# Altium PCB placaMotoresPCB.PcbDoc
Units mm, origin at the board's own origin, x right, y up, seen from the top; angles counter-clockwise.
Board outline 45.21 x 57.66 mm, 2 copper layers (Top Layer, Bottom Layer); 10 components, 39 nets, 74 pads, 0 vias.
Unrouted connection lines stored in the file: 3.
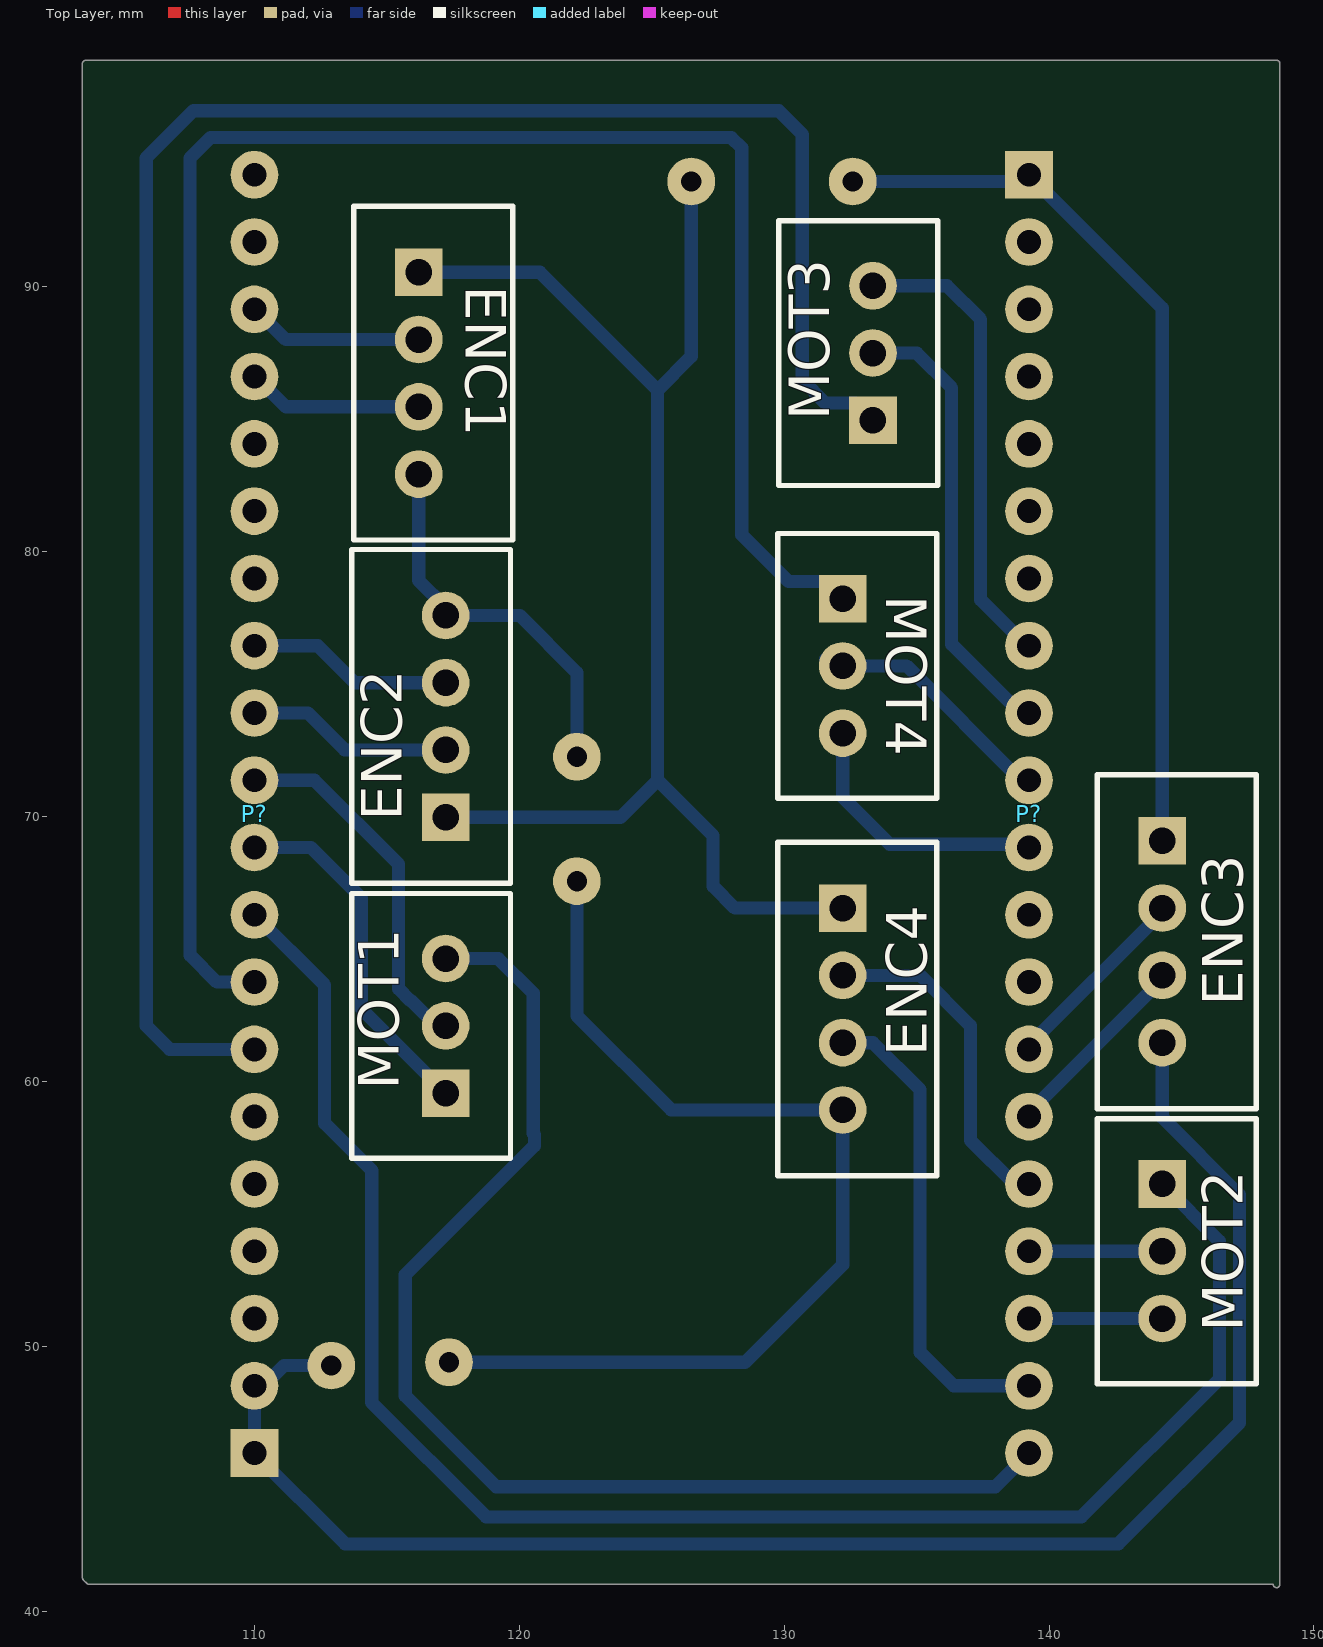
[diagram p0: Top Layer view]
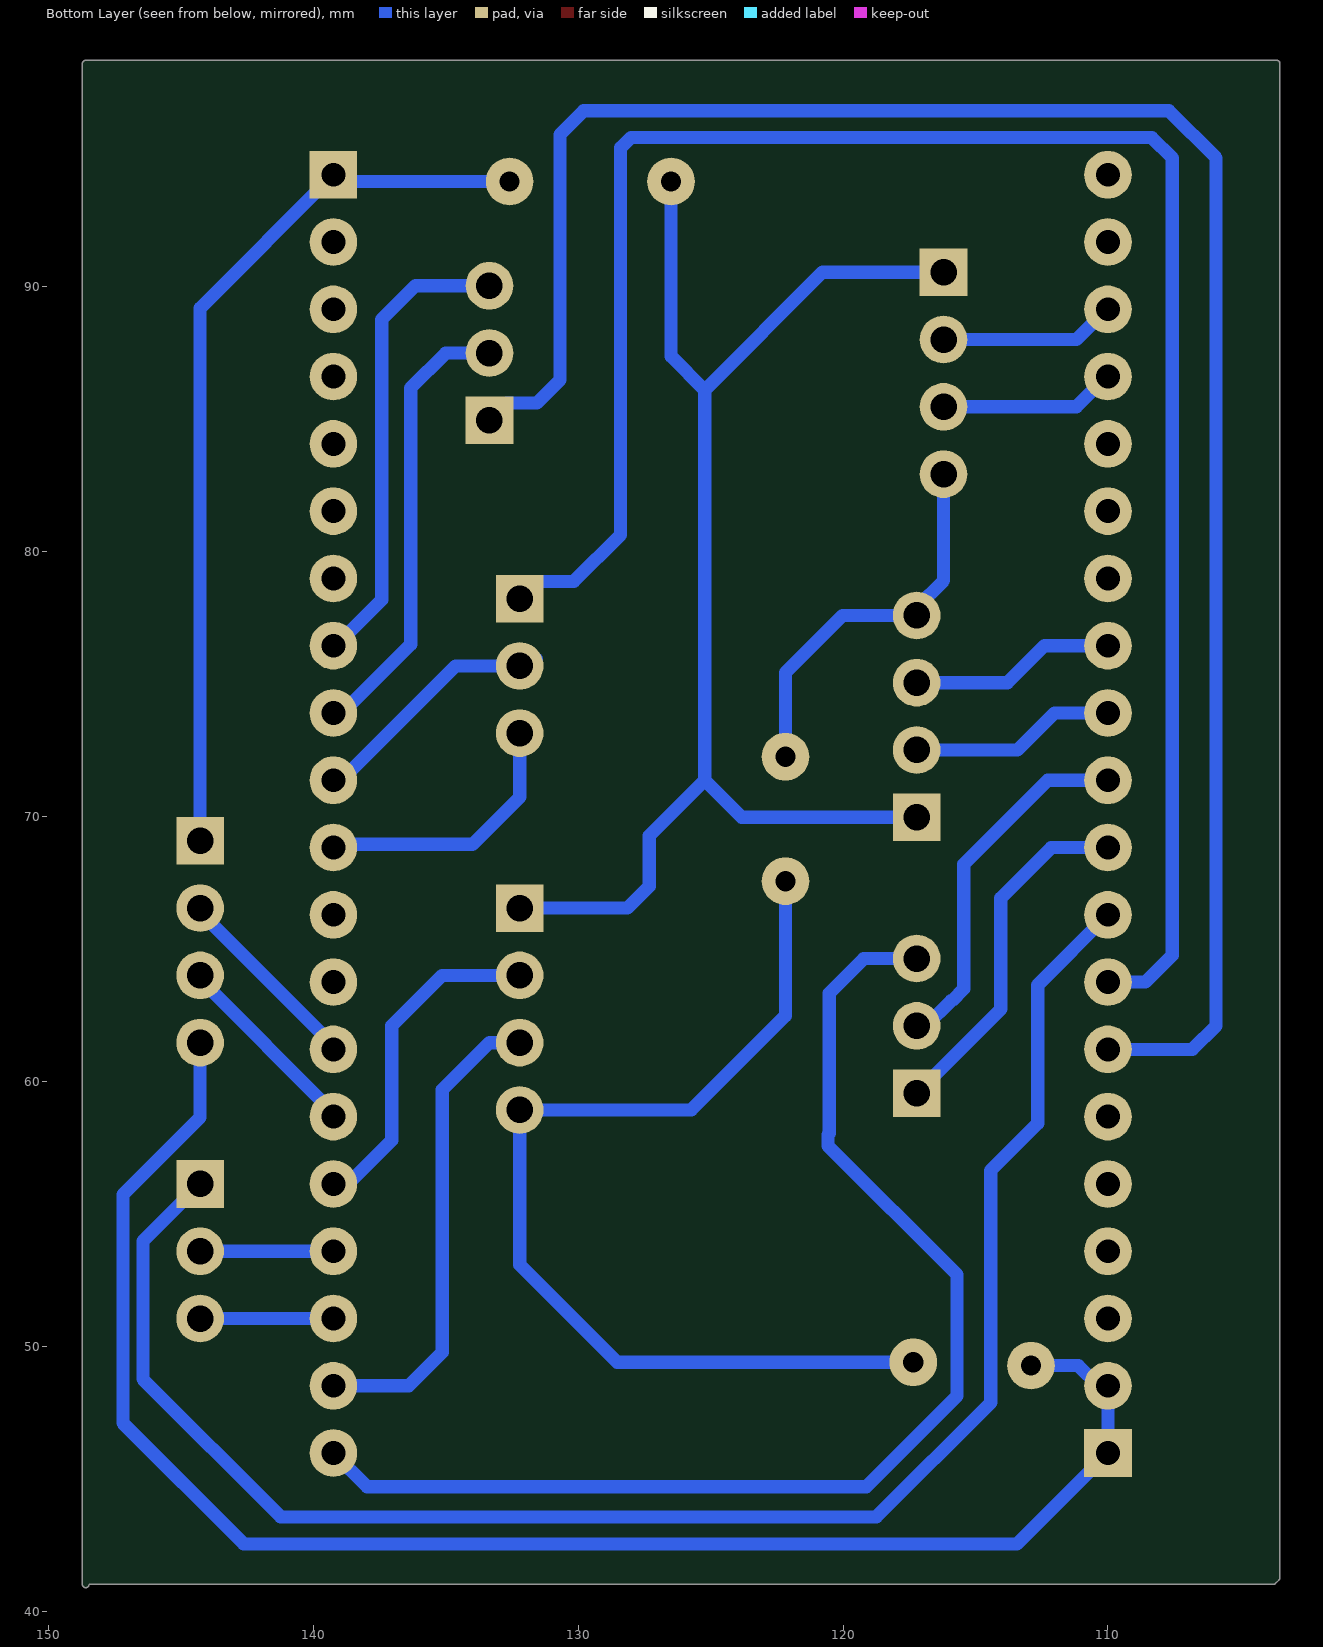
[diagram p1: Bottom Layer view, seen from below]
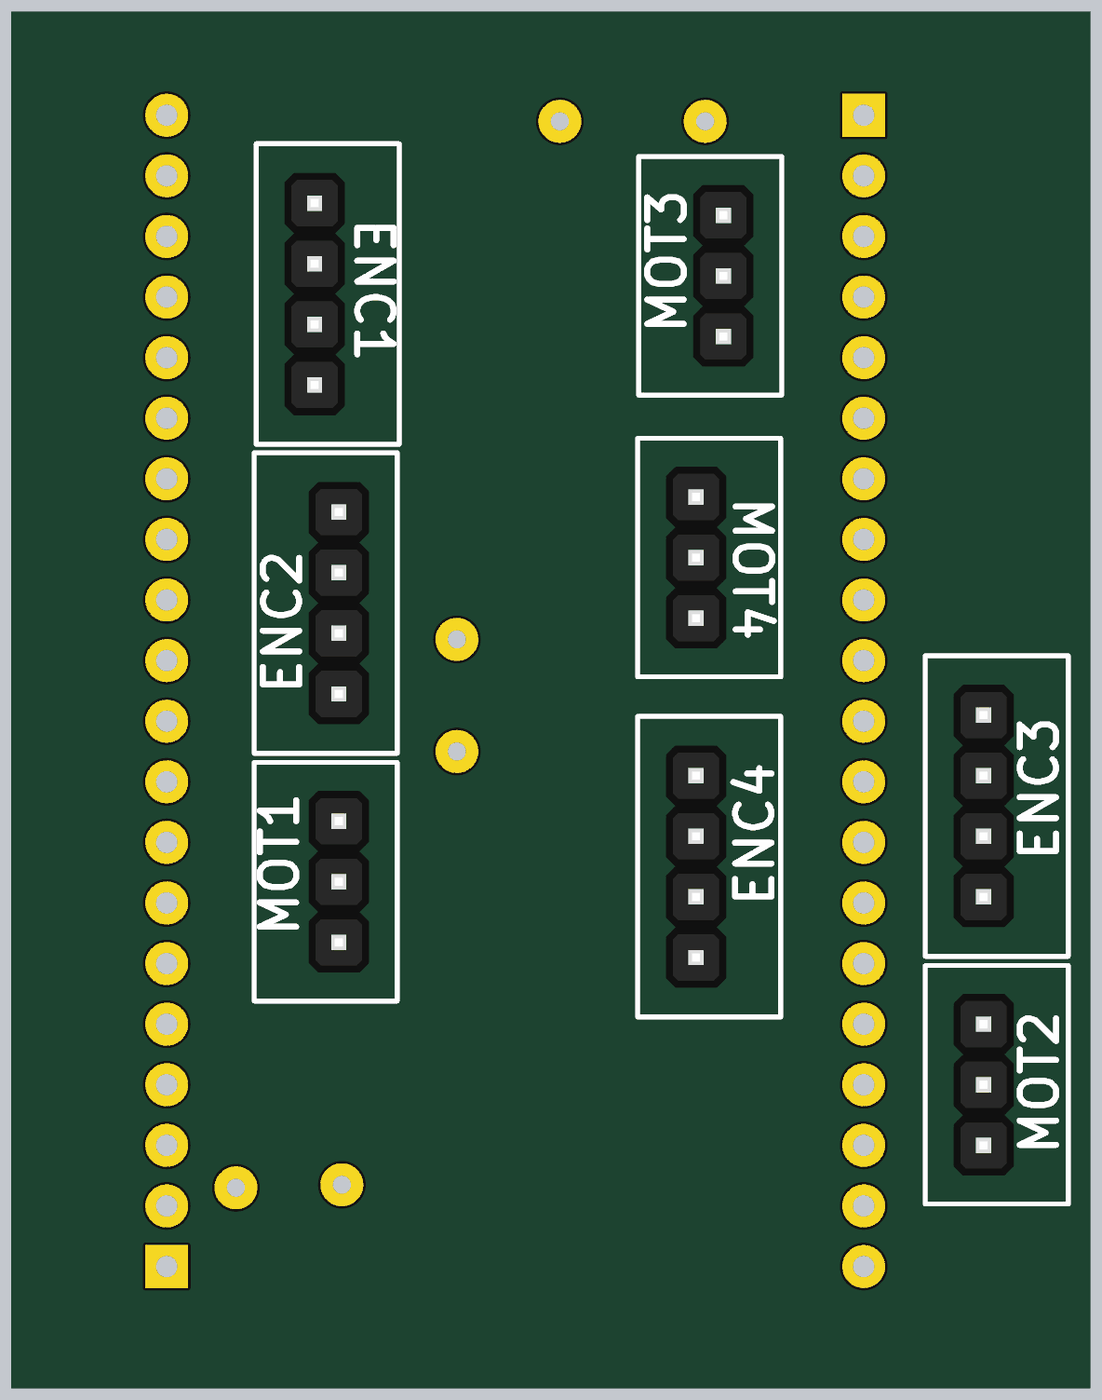
[diagram p2: 3D render of the assembled board from above, using the file's embedded part models]

## Layer stack, top to bottom
Top Solder: solder mask 0.0102, Solder Resist, Dk 3.5
Top Layer: signal copper 0.0356
Dielectric 1: dielectric 0.32, FR-4, Dk 4.8
Bottom Layer: signal copper 0.0356
Bottom Solder: solder mask 0.0102, Solder Resist, Dk 3.5

## Board outline
103.505,41.275 ccw(c103.632,41.275) 103.542,41.184 103.542,41.185 103.669,41.058 103.668,41.058 ccw(c103.759,41.148) 103.759,41.021 148.463,41.021 ccw(c148.59,41.021) 148.717,41.021 148.717,98.425 ccw(c148.59,98.425) 148.59,98.552 103.632,98.552 ccw(c103.632,98.425) 103.505,98.425

## Design rules (kind name [scope] priority, off if disabled: settings)
Clearance [All] p1: gap=0.254 ignorepadtopadclearanceinfootprint=FALSE except(0: Arc-Hole Track-Hole SMDPad-Hole THPad-Hole Via-Hole Fill-Hole Poly-Hole Region-Hole Text-Hole)
DiffPairsRouting [All] p1: maxlimit=0.5 minlimit=0.3 mostfreqgap=0.3 toplayer_minwidth=0.381 toplayer_maxwidth=0.381 toplayer_prefwidth=0.381 bottomlayer_minwidth=0.381 bottomlayer_maxwidth=0.381 bottomlayer_prefwidth=0.381 maxuncoupledlength=12.7
PolygonConnect [All] p1: connectstyle=Relief reliefconductorwidth=0.254 reliefentries=4 polygonreliefangle="90 Angle" airgapwidth=0.254
RoutingVias [All] p1: holewidth=0.711 width=1.27 viastyle="Through Hole" minholewidth=0.711 minwidth=1.27 maxholewidth=0.711 maxwidth=1.27
SolderMaskExpansion [All] p1: expansion=0.102
Width [All] p1: maxlimit=0.5 minlimit=0.3 preferedwidth=0.5 minimp=50.000000 maximp=50.000000 favimp=50.000000
29 further rules are at their usual default settings.

## Classes and differential pairs
component class placaMotoresSch: ENC1 ENC2 ENC3 ENC4 MOT1 MOT2 MOT3 MOT4 P?

## Components (designator, comment, footprint, x,y, rotation, side; value= is the part's Value field where it differs from the comment)
ENC1 "Connector" "1x4x2.54 Pin Header TH V" 116.205,86.741 r270 top
ENC2 "Connector" "1x4x2.54 Pin Header TH V" 117.221,73.787 r90 top
ENC3 "Connector" "1x4x2.54 Pin Header TH V" 144.272,65.278 r270 top
ENC4 "Connector" "1x4x2.54 Pin Header TH V" 132.207,62.738 r270 top
MOT1 "Connector" "1x3x2.54 Pin Header TH V" 117.221,62.103 r90 top
MOT2 "Connector" "1x3x2.54 Pin Header TH V" 144.272,53.594 r270 top
MOT3 "Connector" "1x3x2.54 Pin Header TH V" 133.35,87.503 r90 top
MOT4 "Connector" "1x3x2.54 Pin Header TH V" 132.207,75.692 r270 top
P? "Header 20H" HDR1X20H 110,45.974 r90 top
P? "Header 20H" HDR1X20H 139.24,94.234 r270 top

## Footprints (in the part's own frame and the unit in brackets; to place one, negate y for a bottom-side part, rotate by r counter-clockwise, add the part's x,y. Pads: shape width x height; smd on the part's side, far side on the other; paste and mask are expansions set on the pad)
"1x3x2.54 Pin Header TH V" [mm] "1x3x2.54 Pin Header TH V"
  rect 1.8x1.8 hole 1: 1(-2.54,0)
  round 1.8 hole 1: 2(0,0) 3(2.54,0)
  silkscreen extent -5,-2.45 5,3.55, body extent -3.81,-1.27 3.81,1.27, height 8.55
"1x4x2.54 Pin Header TH V" [mm] "1x4x2.54 Pin Header TH V"
  rect 1.8x1.8 hole 1: 1(-3.81,0)
  round 1.8 hole 1: 2(-1.27,0) 3(1.27,0) 4(3.81,0)
  silkscreen extent -6.3,-2.45 6.3,3.55, body extent -5.08,-1.27 5.08,1.27, height 8.55
HDR1X20H [mm] "Connector; Header; 20 Position; Right Angle"
  rect 1.8x1.8 hole 0.9: 1(0,0)
  round 1.8 hole 0.9: 2(2.54,0) 3(5.08,0) 4(7.62,0) 5(10.16,0) 6(12.7,0) 7(15.24,0) 8(17.78,0) 9(20.32,0) 10(22.86,0) 11(25.4,0) 12(27.94,0) 13(30.48,0) 14(33.02,0) 15(35.56,0) 16(38.1,0) 17(40.64,0) 18(43.18,0) 19(45.72,0) 20(48.26,0)

## Part data
ENC1 ENC2 ENC3 ENC4: library part "Header 1x4"
MOT1 MOT2 MOT3 MOT4: library part "Header 1x3"
P? P?: "Header, 20-Pin, Right Angle", LatestRevisionDate=17-Jul-2002, LatestRevisionNote="Re-released for DXP Platform.", Publisher="Altium Limited"

## Free pads (board coordinates)
  round 1.8 hole 0.762: 2(112.903,49.276) 2(117.348,49.403) 2(122.174,67.564) 2(122.174,72.262) 2(126.492,93.98) 2(132.588,93.98)

## Nets (pads, with @x,y where several pads share a name; then routed paths per layer and width w, separated by ;. In a path a pad name is that pad's centre, name@x,y a point inside that pad or via, vN(x,y) a via of type N, cw(c..) or ccw(c..) an arc to the next point about the centre after c; other vN are vias at no path point)
3.3V_1: ENC1.1 ENC2.1 ENC3.1 ENC4.1 P?.1@139.24,94.234 pad.2@126.492,93.98 pad.2@132.588,93.98 | length 86.7
  Bottom Layer w0.5: ENC1.1 120.777,90.551 125.222,86.106 ; ENC2.1 123.825,69.977 125.222,71.374 ; pad.2@126.492,93.98 126.492,87.376 125.222,86.106 ; ENC4.1 128.143,66.548 127.317,67.373 127.317,69.278 125.222,71.374 ; pad.2@132.588,93.98 138.986,93.98 139.24,94.234 144.272,89.202 ENC3.1 ; 125.222,71.374 125.222,86.106
3.3V_2: P?.3@110,51.054
5V: P?.3@139.24,89.154
GND: P?.2@139.24,91.694
GND1: ENC1.4 ENC2.4 ENC3.4 ENC4.4 P?.1@110,45.974 P?.2@110,48.514 pad.2@112.903,49.276 pad.2@117.348,49.403 pad.2@122.174,67.564 pad.2@122.174,72.262 | length 115.8
  Bottom Layer w0.5: pad.2@112.903,49.276 111.114,49.276 110.352,48.514 110,48.514 110,45.974 113.429,42.545 142.621,42.545 147.185,47.109 147.185,55.734 144.272,58.647 ENC3.4 ; ENC1.4 116.205,78.914 117.221,77.898 ENC2.4 120.015,77.597 122.174,75.438 pad.2@122.174,72.262 ; pad.2@117.348,49.403 128.524,49.403 132.207,53.086 ENC4.4 125.73,58.928 122.174,62.484 pad.2@122.174,67.945
PA0: P?.16@110,84.074
PA1: P?.15@110,81.534
PA2: P?.14@110,78.994
PA3: ENC2.3 P?.13@110,76.454 | length 7.8
  Bottom Layer w0.5: P?.13@110,76.454 112.395,76.454 113.792,75.057 ENC2.3
PA4: ENC2.2 P?.12@110,73.914 | length 7.8
  Bottom Layer w0.5: P?.12@110,73.914 112.014,73.914 113.411,72.517 ENC2.2
PA5: MOT1.2 P?.11@110,71.374 | length 13.8
  Bottom Layer w0.5: P?.11@110,71.374 112.268,71.374 115.443,68.199 115.443,63.5 115.884,63.059 115.913,63.059 116.869,62.103 MOT1.2
PA6: MOT1.1 P?.10@110,68.834 | length 13.5
  Bottom Layer w0.5: P?.10@110,68.834 112.141,68.834 114.046,66.929 114.046,62.738 MOT1.1
PA7: MOT2.1 P?.9@110,66.294 | length 64.5
  Bottom Layer w0.5: P?.9@110,66.294 112.649,63.645 112.649,58.42 114.427,56.642 114.427,47.879 118.745,43.561 141.224,43.561 146.431,48.768 146.431,53.975 MOT2.1
PA8: ENC4.2 P?.16@139.24,56.134 | length 12.8
  Bottom Layer w0.5: ENC4.2 135.128,64.008 137.033,62.103 137.033,57.785 138.684,56.134 P?.16@139.24,56.134
PA9: ENC3.3 P?.15@139.24,58.674 | length 7.4
  Bottom Layer w0.5: P?.15@139.24,58.674 139.24,58.825 144.272,63.857 ENC3.3
PA10: ENC3.2 P?.14@139.24,61.214 | length 7.4
  Bottom Layer w0.5: P?.14@139.24,61.214 139.24,61.365 144.272,66.397 ENC3.2
PA11: P?.13@139.24,63.754
PA12: P?.12@139.24,66.294
PA15: MOT4.3 P?.11@139.24,68.834 | length 10.4
  Bottom Layer w0.5: MOT4.3@132.207,73.406 132.207,70.739 133.985,68.961 P?.11@139.24,68.961
PB0: MOT4.1 P?.8@110,63.754 | length 73.7
  Bottom Layer w0.5: P?.8@110,63.754 108.585,63.754 107.569,64.77 107.569,65.024 107.569,66.04 107.569,94.869 108.338,95.638 128.009,95.638 128.397,95.25 128.397,80.645 130.16,78.882 131.557,78.882 MOT4.1
PB1: MOT3.1 P?.7@110,61.214 | length 75.7
  Bottom Layer w0.5: P?.7@110,61.214 106.807,61.214 105.918,62.103 105.918,94.107 105.918,94.869 107.696,96.647 129.794,96.647 130.683,95.758 130.683,86.487 131.557,85.613 132.7,85.613 MOT3.1
PB3: MOT4.2 P?.10@139.24,71.374 | length 9.5
  Bottom Layer w0.5: MOT4.2@131.572,75.946 MOT4.2@132.017,75.501 ; MOT4.2 134.62,75.692 138.938,71.374 P?.10@139.24,71.374
PB4: MOT3.2 P?.9@139.24,73.914 | length 17.2
  Bottom Layer w0.5: MOT3.2 135.001,87.503 136.319,86.185 136.319,76.502 138.907,73.914 P?.9@139.24,73.914
PB5: MOT3.3 P?.8@139.24,76.454 | length 17.7
  Bottom Layer w0.5: MOT3.3 136.144,90.043 137.414,88.773 137.414,78.193 139.153,76.454 P?.8@139.24,76.454
PB6: P?.7@139.24,78.994
PB7: P?.6@139.24,81.534
PB8: P?.5@139.24,84.074
PB9: P?.4@139.24,86.614
PB10: P?.6@110,58.674
PB11: P?.5@110,56.134
PB12: MOT1.3 P?.20@139.24,45.974 | length 46.6
  Bottom Layer w0.5: MOT1.3 119.214,64.643 120.523,63.334 120.523,58.039 120.57,57.992 120.57,57.578 115.697,52.705 115.697,48.133 119.126,44.704 137.97,44.704 P?.20@139.24,45.974
PB13: ENC4.3 P?.19@139.24,48.514 | length 18.2
  Bottom Layer w0.5: ENC4.3 133.35,61.468 135.128,59.69 135.128,49.784 136.398,48.514 P?.19@139.24,48.514
PB14: MOT2.3 P?.18@139.24,51.054 | length 5
  Bottom Layer w0.5: P?.18@139.24,51.054 MOT2.3
PB15: MOT2.2 P?.17@139.24,53.594 | length 5
  Bottom Layer w0.5: P?.17@139.24,53.594 MOT2.2
PC13: P?.19@110,91.694
PC14: ENC1.2 P?.18@110,89.154 | length 6.7
  Bottom Layer w0.5: P?.18@110,89.154 110.047,89.154 111.19,88.011 ENC1.2
PC15: ENC1.3 P?.17@110,86.614 | length 6.7
  Bottom Layer w0.5: P?.17@110,86.614 110.047,86.614 111.19,85.471 ENC1.3
RESET: P?.4@110,53.594
VB: P?.20@110,94.234

## Silkscreen, mask and mechanical layers (free items; w line width, h text height)
Mechanical 1:
  lines w0.254: 103.632,41.275 103.632,98.425 148.59,98.425 148.59,41.021 148.463,41.148 103.759,41.148 103.632,41.275